# EAGLE board flex_v1 (EAGLE 8.0.0)

Size 78 x 68 mm. Coordinates in mm from the lower left corner, seen from the top.
Outline: 0,0 78,0 78,68 0,68 0,0
Copper layers (1*16): Top 0.035mm / dielectric 1.5mm / Bottom 0.035mm
Design rules "default": minimum track width 10mil, minimum drill 24mil, track to track 8mil, track to pad 8mil, pad to pad 8mil, via to via 8mil, smd to smd 8mil, copper to edge 40mil, drill to drill 8mil, minimum pad ring 10mil, minimum via ring 8mil, stop-mask expansion 4mil, vias tented up to drill 0mil, thermal gap 10mil

## Footprints (pad centres in the part's own frame; a part is rotated, then mirrored left to right if it is on the bottom)
KK254_VERT_2PIN = drill 1.2 octagon: P$1 1.27,0; P$2 -1.27,0
KK254_VERT_4PIN = drill 1.2 octagon: P$1 3.81,0; P$2 1.27,0; P$3 -1.27,0; P$4 -3.81,0
MPSC-01-80 = drill 1.05 square: 1 19,0.33 | drill 0.86 octagon: 2 17,0.33 | drill 1.05 octagon: 3 15,0.33; 4 13,0.33; 5 11,0.33; 6 9,0.33; 7 7,0.33; 8 5,0.33; 9 3,0.33; 10 1,0.33; 11 -1,0.33; 12 -3,0.33; 13 -5,0.33; 14 -7,0.33; 15 -9,0.33; 16 -11,0.33; 17 -13,0.33; 18 -15,0.33; 19 -17,0.33; 20 -19,0.33; 21 19,2.33; 22 17,2.33; 23 15,2.33; 24 13,2.33; 25 11,2.33; 26 9,2.33; 27 7,2.33; 28 5,2.33; 29 3,2.33; 30 1,2.33; 31 -1,2.33; 32 -3,2.33; 33 -5,2.33; 34 -7,2.33; 35 -9,2.33; 36 -11,2.33; 37 -13,2.33; 38 -15,2.33; 39 -17,2.33; 40 -19,2.33; 41 19,4.33; 42 17,4.33; 43 15,4.33; 44 13,4.33; 45 11,4.33; 46 9,4.33; 47 7,4.33; 48 5,4.33; 49 3,4.33; 50 1,4.33; 51 -1,4.33; 52 -3,4.33; 53 -5,4.33; 54 -7,4.33; 55 -9,4.33; 56 -11,4.33; 57 -13,4.33; 58 -15,4.33; 59 -17,4.33; 60 -19,4.33; 61 19,6.33; 62 17,6.33; 63 15,6.33; 64 13,6.33; 65 11,6.33; 66 9,6.33; 67 7,6.33; 68 5,6.33; 69 3,6.33; 70 1,6.33; 71 -1,6.33; 72 -3,6.33; 73 -5,6.33; 74 -7,6.33; 75 -9,6.33; 76 -11,6.33; 77 -13,6.33; 78 -15,6.33; 79 -17,6.33; 80 -19,6.33 | drill 1.1 octagon: P1,1 -24.385,0.79; P1,2 -22.505,0.79; P1,3 -24.385,3.33; P1,4 -22.505,3.33; P1,5 -24.385,5.87; P1,6 -22.505,5.87; P2,1 24.385,0.789; P2,2 22.505,0.789; P2,3 24.385,3.329; P2,4 22.505,3.329; P2,5 24.385,5.869; P2,6 22.505,5.869 | hole 1.2: -27.145,3.3; 27.145,3.3
KK254_6PIN = drill 0.8 octagon: P$1 -6.35,0; P$2 -3.81,0; P$3 -1.27,0; P$4 1.27,0; P$5 3.81,0; P$6 6.35,0

## Placement (x,y rotation side)
2PIN_1  [KK254_VERT_2PIN]  -26.67,58.42 0 top  (outside the outline)
2PIN_2  [KK254_VERT_2PIN]  -35.56,58.42 0 top  (outside the outline)
2PIN_3  [KK254_VERT_2PIN]  -44.45,58.42 0 top  (outside the outline)
2PIN_4  [KK254_VERT_2PIN]  -53.34,58.42 0 top  (outside the outline)
2PIN_5  [KK254_VERT_2PIN]  -62.23,58.42 0 top  (outside the outline)
2PIN_6  [KK254_VERT_2PIN]  -71.12,58.42 0 top  (outside the outline)
2PIN_7  [KK254_VERT_2PIN]  -17.78,67.31 0 top  (outside the outline)
2PIN_8  [KK254_VERT_2PIN]  -26.67,67.31 0 top  (outside the outline)
2PIN_9  [KK254_VERT_2PIN]  -35.56,67.31 0 top  (outside the outline)
2PIN_10  [KK254_VERT_2PIN]  -73.66,21.59 0 top  (outside the outline)
2PIN_11  [KK254_VERT_2PIN]  -17.78,31.75 0 top  (outside the outline)
2PIN_12  [KK254_VERT_2PIN]  -26.67,31.75 0 top  (outside the outline)
2PIN_13  [KK254_VERT_2PIN]  -35.56,31.75 0 top  (outside the outline)
2PIN_14  [KK254_VERT_2PIN]  -44.45,31.75 0 top  (outside the outline)
2PIN_15  [KK254_VERT_2PIN]  -53.34,31.75 0 top  (outside the outline)
2PIN_16  [KK254_VERT_2PIN]  -62.23,31.75 0 top  (outside the outline)
2PIN_17  [KK254_VERT_2PIN]  -71.12,31.75 0 top  (outside the outline)
2PIN_18  [KK254_VERT_2PIN]  -17.78,40.64 0 top  (outside the outline)
2PIN_19  [KK254_VERT_2PIN]  -26.67,40.64 0 top  (outside the outline)
2PIN_20  [KK254_VERT_2PIN]  -35.56,40.64 0 top  (outside the outline)
2PIN_21  [KK254_VERT_2PIN]  -44.45,40.64 0 top  (outside the outline)
2PIN_22  [KK254_VERT_2PIN]  -53.34,40.64 0 top  (outside the outline)
2PIN_23  [KK254_VERT_2PIN]  -62.23,40.64 0 top  (outside the outline)
2PIN_24  [KK254_VERT_2PIN]  -71.12,40.64 0 top  (outside the outline)
2PIN_25  [KK254_VERT_2PIN]  -17.78,49.53 0 top  (outside the outline)
2PIN_26  [KK254_VERT_2PIN]  -26.67,49.53 0 top  (outside the outline)
2PIN_27  [KK254_VERT_2PIN]  -35.56,49.53 0 top  (outside the outline)
2PIN_28  [KK254_VERT_2PIN]  -44.45,49.53 0 top  (outside the outline)
2PIN_29  [KK254_VERT_2PIN]  -53.34,49.53 0 top  (outside the outline)
2PIN_30  [KK254_VERT_2PIN]  -62.23,49.53 0 top  (outside the outline)
2PIN_31  [KK254_VERT_2PIN]  -71.12,49.53 0 top  (outside the outline)
2PIN_32  [KK254_VERT_2PIN]  -17.78,58.42 0 top  (outside the outline)
4PIN_1  [KK254_VERT_4PIN]  -20.32,21.59 0 top  (outside the outline)
4PIN_2  [KK254_VERT_4PIN]  -34.29,21.59 0 top  (outside the outline)
4PIN_3  [KK254_VERT_4PIN]  -48.26,21.59 0 top  (outside the outline)
4PIN_4  [KK254_VERT_4PIN]  -62.23,21.59 0 top  (outside the outline)
JP1  [MPSC-01-80]  -43.18,7.62 0 top  (outside the outline)
U$1  [KK254_6PIN]  -48.26,66.04 0 top  (outside the outline)
U$2  [KK254_6PIN]  -64.77,66.04 0 top  (outside the outline)
U$3  [KK254_6PIN]  -21.59,74.93 0 top  (outside the outline)

## Library data of the parts
2PIN_1-2PIN_32 4PIN_1-4PIN_4 U$1-U$3 = molex
JP1 = samtec

## Nets
3V3: JP1.3 JP1.23 JP1.43 JP1.63
4-1-1: 4PIN_1.P$1
4-1-2: 4PIN_1.P$2
4-1-3: 4PIN_1.P$3
4-1-4: 4PIN_1.P$4
4-2-1: 4PIN_2.P$1
4-2-2: 4PIN_2.P$2
4-2-3: 4PIN_2.P$3
4-2-4: 4PIN_2.P$4
4-3-1: 4PIN_3.P$1
4-3-2: 4PIN_3.P$2
4-3-3: 4PIN_3.P$3
4-3-4: 4PIN_3.P$4
4-4-1: 4PIN_4.P$1
4-4-2: 4PIN_4.P$2
4-4-3: 4PIN_4.P$3
4-4-4: 4PIN_4.P$4
4_1_1: 2PIN_1.P$1 2PIN_2.P$1 2PIN_3.P$1 2PIN_4.P$1 2PIN_5.P$1 2PIN_6.P$1 2PIN_7.P$1 2PIN_8.P$1 2PIN_9.P$1 2PIN_10.P$1 2PIN_11.P$1 2PIN_12.P$1 2PIN_13.P$1 2PIN_14.P$1 2PIN_15.P$1 2PIN_16.P$1 2PIN_17.P$1 2PIN_18.P$1 2PIN_19.P$1 2PIN_20.P$1 2PIN_21.P$1 2PIN_22.P$1 2PIN_23.P$1 2PIN_24.P$1 2PIN_25.P$1 2PIN_26.P$1 2PIN_27.P$1 2PIN_28.P$1 2PIN_29.P$1 2PIN_30.P$1 2PIN_31.P$1 2PIN_32.P$1
5V: JP1.2 JP1.22 JP1.42 JP1.62
6-1-1: U$1.P$1
6-1-2: U$1.P$2
6-1-3: U$1.P$3
6-1-4: U$1.P$4
6-1-5: U$1.P$5
6-1-6: U$1.P$6
6-2-1: U$2.P$1
6-2-2: U$2.P$2
6-2-3: U$2.P$3
6-2-4: U$2.P$4
6-2-5: U$2.P$5
6-2-6: U$2.P$6
6-3-1: U$3.P$1
6-3-2: U$3.P$2
6-3-3: U$3.P$3
6-3-4: U$3.P$4
6-3-5: U$3.P$5
6-3-6: U$3.P$6
12V: JP1.1 JP1.21 JP1.41 JP1.61
CANH: JP1.25
CANL: JP1.26
CE_2: JP1.54
CE_3: JP1.55
CE_4: JP1.56
CE_CPU: JP1.53
CE_LEDS: JP1.52
CTS_0: JP1.47
CTS_1: JP1.31
CTS_2: JP1.71
CTS_3: JP1.75
CTS_4: JP1.79
CTS_5: JP1.67
GND: JP1.4 JP1.12 JP1.15 JP1.18 JP1.24 JP1.33 JP1.34 JP1.36 JP1.37 JP1.39 JP1.40 JP1.44 JP1.64 JP1.P2,1 JP1.P2,2 JP1.P2,3 JP1.P2,4 JP1.P2,5 JP1.P2,6
GPIO_0: JP1.35
GPIO_1: JP1.38
GPIO_2: JP1.11
GPIO_3: JP1.57
GPIO_4: JP1.58
GPIO_5: JP1.13
GPIO_6: JP1.14
GPIO_7: JP1.16
GPIO_8: JP1.17
MISO: JP1.51
MOSI: JP1.50
N$1: 2PIN_2.P$2
N$2: 2PIN_1.P$2
N$3: 2PIN_3.P$2
N$4: 2PIN_4.P$2
N$5: 2PIN_5.P$2
N$6: 2PIN_6.P$2
N$7: 2PIN_7.P$2
N$8: 2PIN_8.P$2
N$9: 2PIN_9.P$2
N$10: 2PIN_10.P$2
N$11: 2PIN_11.P$2
N$12: 2PIN_12.P$2
N$13: 2PIN_13.P$2
N$14: 2PIN_14.P$2
N$15: 2PIN_15.P$2
N$16: 2PIN_16.P$2
N$17: 2PIN_17.P$2
N$18: 2PIN_18.P$2
N$19: 2PIN_19.P$2
N$20: 2PIN_20.P$2
N$21: 2PIN_21.P$2
N$22: 2PIN_22.P$2
N$23: 2PIN_23.P$2
N$24: 2PIN_24.P$2
N$25: 2PIN_25.P$2
N$26: 2PIN_26.P$2
N$27: 2PIN_27.P$2
N$28: 2PIN_28.P$2
N$29: 2PIN_29.P$2
N$30: 2PIN_30.P$2
N$31: 2PIN_31.P$2
N$32: 2PIN_32.P$2
PWM_0: JP1.7
PWM_1: JP1.8
RTS_0: JP1.48
RTS_1: JP1.32
RTS_2: JP1.72
RTS_3: JP1.76
RTS_4: JP1.80
RTS_5: JP1.68
RX_0: JP1.45
RX_1: JP1.29
RX_2: JP1.69
RX_3: JP1.73
RX_4: JP1.77
RX_5: JP1.65
SCL_0: JP1.28
SCL_1: JP1.10
SCL_2: JP1.60
SCL_3: JP1.6
SDA_0: JP1.27
SDA_1: JP1.9
SDA_2: JP1.59
SDA_3: JP1.5
SPI_CLK: JP1.49
TX_0: JP1.46
TX_1: JP1.30
TX_2: JP1.70
TX_3: JP1.74
TX_4: JP1.78
TX_5: JP1.66
USB_M: JP1.19
USB_P: JP1.20
V_BATT: JP1.P1,1 JP1.P1,2 JP1.P1,3 JP1.P1,4 JP1.P1,5 JP1.P1,6

## Tracks (layer width: path | path; a pad name or v marks a point on that pad's centre or on a via)
3V3  (3 unrouted)
4_1_1  (31 unrouted)
5V  (3 unrouted)
12V  (3 unrouted)
GND  (18 unrouted)
V_BATT  (5 unrouted)